# EAGLE board battery (EAGLE 5.11)
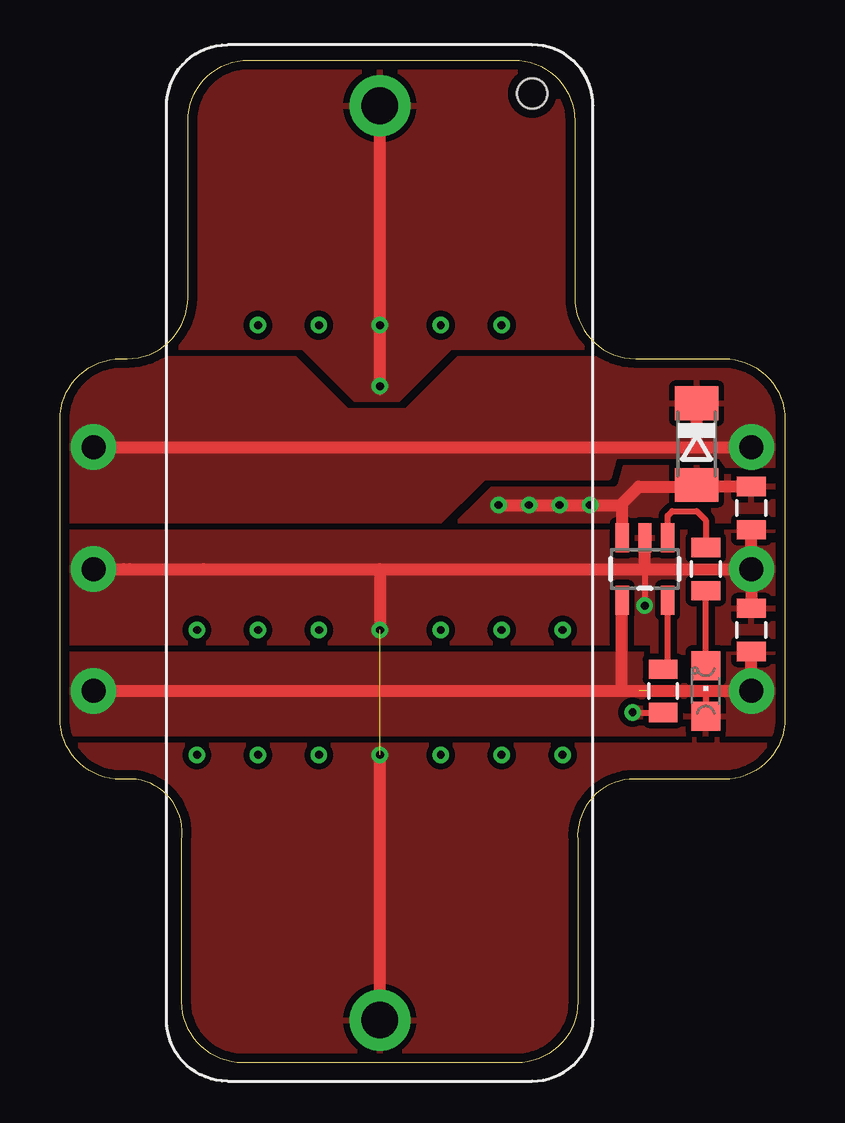
[diagram p0: board, top side]
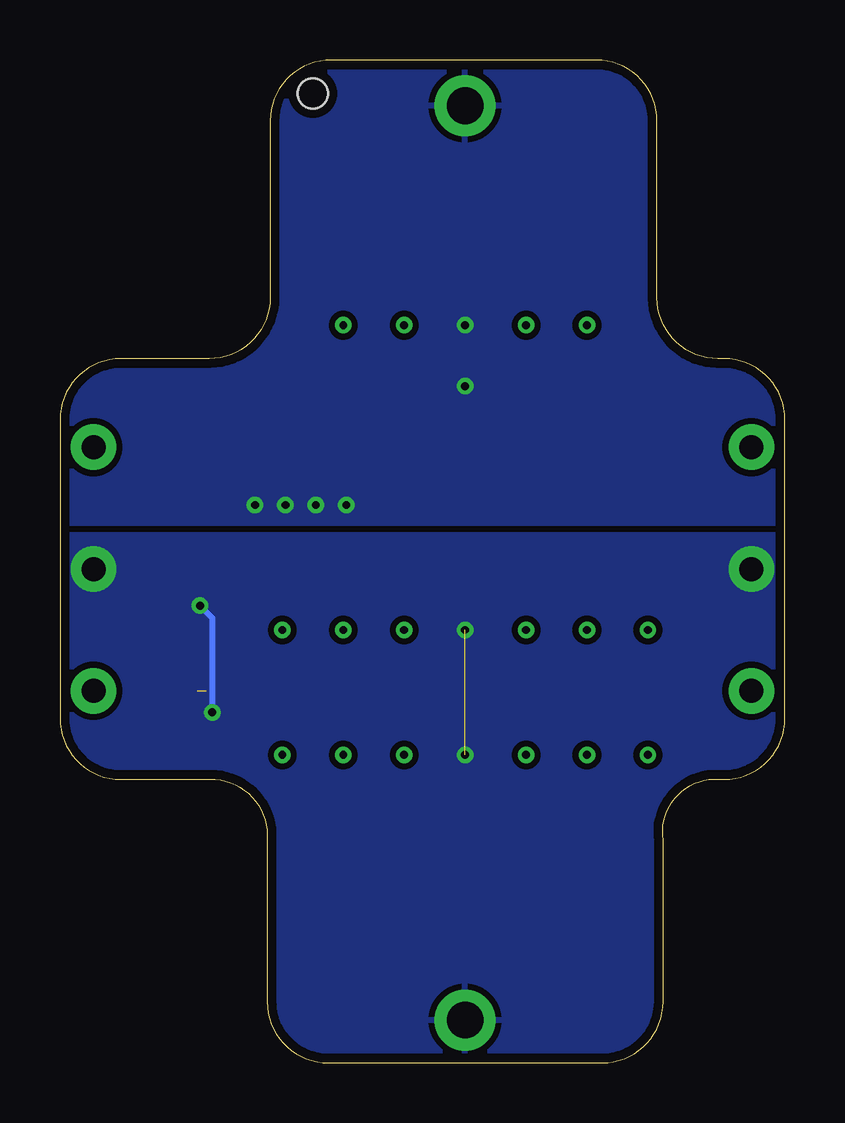
[diagram p1: board, bottom side, seen from below]

Size 30.23 x 41.78 mm. Coordinates in mm from the lower left corner, seen from the top.
Outline: 2.54,11.81 arc-90 0,14.35 0,26.8 arc-90 2.54,29.34 2.79,29.34 arc90 5.33,31.88 5.33,39.24 arc-90 7.87,41.78 18.92,41.78 arc-90 21.46,39.24 21.46,31.88 arc90 24,29.34 27.69,29.34 arc-90 30.23,26.8 30.23,14.35 arc-90 27.69,11.81 23.75,11.81 arc90 21.59,9.27 21.59,2.54 arc-90 19.05,0 7.62,0 arc-90 5.08,2.54 5.08,9.27 arc90 3.17,11.81 2.54,11.81
Copper layers (1*16): Top 0.0356mm / dielectric 1.5011mm / Bottom 0.0356mm
Design rules "LaenPCBOrder *": minimum track width 6mil, minimum drill 13mil, track to track 6mil, track to pad 6mil, pad to pad 6mil, via to via 6mil, smd to smd 6mil, copper to edge 15mil, drill to drill 6mil, minimum pad ring 7mil, minimum via ring 7mil, stop-mask expansion 4mil, vias tented up to drill 14mil, thermal gap 10mil

## Footprints (pad centres in the part's own frame; a part is rotated, then mirrored left to right if it is on the bottom)
0805 = smd 0.8 x 1.2: 1 -0.9,0; 2 0.9,0
CHIPLED_0805 = smd 1.2 x 1.2: A 0,-1.05; C 0,1.05
SOD80C = smd 1.4 x 1.8: A 1.7,0; C -1.7,0
CR2/3 = drill 1.524 pad 2.54 round: + 19.05,0; - -19.05,0 | hole 1.27: 19.558,-6.35
SOT23-5 = smd 0.55 x 1.2: 1 -0.95,-1.3; 2 0,-1.3; 3 0.95,-1.3; 4 0.95,1.3; 5 -0.95,1.3

## Placement (x,y rotation side)
C7  10uF  [0805]  28.83,23.11 270 top
C8  10uF  [0805]  28.83,18.03 90 top
CHARGE  Orange  [CHIPLED_0805]  26.92,15.49 0 top
D2  [SOD80C]  26.54,25.78 270 top
G1  RCR123A  [CR2/3]  13.34,20.83 90 top
PROGCHARGE  4.7k  [0805]  25.15,15.49 90 top
RCHARGE  1170  [0805]  26.92,20.57 270 top
U1  MCP73831  [SOT23-5]  24.38,20.57 180 top

## Library data of the parts
C7 C8 PROGCHARGE RCHARGE U1 = SparkFun
CHARGE = led
D2 = diode
G1 = RyanK

## Nets
GND: C7.2 C8.2 G1.- PROGCHARGE.1 U1.2
N$9: CHARGE.C RCHARGE.2
N$10: RCHARGE.1 U1.1
N$11: PROGCHARGE.2 U1.5
N$60: D2.C
VRAW: C7.1 D2.A G1.+ U1.3
VUSB: C8.1 CHARGE.A U1.4

## Tracks (layer width: path | path; a pad name or v marks a point on that pad's centre or on a via)
GND  (via drill 0.33, 1 pad 1.91)  (1 unrouted)
  Top 0.254: 5.97,20.57 5.98,20.56 | 2.92,20.57 3.04,20.46 | 2.67,20.57 22.62,20.56 | PROGCHARGE.1 23.89,14.59 v23.88,14.61 | v24.38,19.05 24.38,20.45 24.51,20.57
  Top 0.508: v28.83,20.57 24.51,20.57 24.38,20.57 | 13.34,20.57 24.38,20.57 | G1.- v13.34,12.83 | 13.34,20.57 v13.34,18.03 | 13.34,20.57 5.97,20.57 2.92,20.57 2.67,20.57 v1.4,20.57 | v28.83,20.57 C8.2 | v28.83,20.57 C7.2 | 24.38,20.57 U1.2
  Bottom 0.254: v23.88,14.61 23.88,18.54 v24.38,19.05
  pour Top (isolate 0.254, rank 2): 0.25,22.1 30.48,22.1 29.97,13.59 29.97,12.83 28.19,11.56 23.11,11.56 22.23,10.67 22.23,1.91 19.94,-0.38 6.35,-0.38 6.22,-0.25 4.7,1.78 4.7,11.05 3.68,12.06 1.91,12.06 1.78,12.19 1.65,12.19 0.64,13.21 0.64,13.59 0.25,13.97 0.13,21.59
  pour Bottom (isolate 0.254): -0.64,21.97 35.05,21.97 36.83,16.64 33.78,-3.17 34.54,-3.94 3.94,-3.94 -1.78,1.78 -1.78,20.32 -1.14,20.95
N$9
  Top 0.254: CHARGE.C RCHARGE.2
N$10
  Top 0.254: RCHARGE.1 26.92,22.61 26.54,22.99 25.53,22.99 25.33,22.79 U1.1
N$11
  Top 0.254: U1.5 25.33,16.46 PROGCHARGE.2
N$60  (via drill 1 pad 1.91)
  Top 0.508: 26.54,25.65 v28.83,25.65 | v1.4,25.65 26.54,25.65 | 26.54,25.65 D2.C
  pour Top (isolate 0.254, rank 3): -0.51,29.34 9.78,29.34 11.94,27.18 14.48,27.18 16.64,29.34 32.77,29.34 32.89,28.07 32.89,24.89 27.81,24.89 27.56,25.27 23.11,25.27 22.86,24.38 17.65,24.38 15.62,22.35 -0.13,22.35 -0.89,23.88 -0.89,28.07
N$63  (via drill 0.33)
  other vias: 10.79,30.73
N$64  (via drill 0.33)
  other vias: 8.26,30.73
N$65  (via drill 0.33)
  other vias: 15.88,30.73
N$66  (via drill 0.33)
  other vias: 18.41,30.73
N$67  (via drill 0.33)
  other vias: 15.88,12.83
N$68  (via drill 0.33)
  other vias: 10.79,12.83
N$69  (via drill 0.33)
  other vias: 8.26,12.83
N$70  (via drill 0.33)
  other vias: 18.41,12.83
N$71  (via drill 0.33)
  other vias: 20.95,12.83
N$72  (via drill 0.33)
  other vias: 5.71,12.83
N$73  (via drill 0.33)
  other vias: 15.88,18.03
N$74  (via drill 0.33)
  other vias: 18.41,18.03
N$75  (via drill 0.33)
  other vias: 20.95,18.03
N$76  (via drill 0.33)
  other vias: 10.79,18.03
N$77  (via drill 0.33)
  other vias: 8.26,18.03
N$78  (via drill 0.33)
  other vias: 5.71,18.03
VRAW  (via drill 0.33)
  Top 0.508: D2.A 26.49,24.13 | C7.1 26.61,24.01 D2.A | G1.+ v13.34,30.73 v13.34,28.19 13.34,28.07 | v18.29,23.24 v19.56,23.24 v20.83,23.24 v22.1,23.24 23.37,23.24 | 23.37,23.24 24.13,24 26.46,24 D2.A | U1.3 23.43,23.18 23.37,23.24
  pour Top (isolate 0.254, rank 6): 0.25,43.18 35.05,43.18 36.83,41.4 36.83,24.64 33.4,21.21 16.13,21.21 13.97,23.37 13.97,23.88 9.4,27.69 -0.13,27.69 -0.25,27.56 -0.89,42.04
  pour Bottom (isolate 0.254, rank 2): -0.89,44.2 21.72,44.2 39.37,26.54 37.34,26.54 44.07,21.72 -0.38,21.72 -0.64,43.56 -0.89,43.81
VUSB  (via drill 1 pad 1.91)  (1 unrouted)
  Top 0.254: 24.51,15.49 24.51,15.37 | 24.13,15.5 | 4.38,15.57 4.38,15.49 4.32,15.49 | 26.92,15.5 CHARGE.A
  Top 0.508: v28.83,15.5 v28.83,15.49 | v28.83,15.5 26.92,15.5 26.42,15.5 26.42,15.49 24.51,15.49 23.5,15.49 | 23.5,15.49 4.32,15.49 v1.4,15.49 | v28.83,15.5 C8.1 | U1.4 23.43,15.55 23.5,15.49
  pour Top (isolate 0.254): -0.76,17.02 36.45,17.02 36.83,17.14 36.83,13.72 -0.25,13.72 -0.76,14.22